# Altium PCB cover.PcbDoc
Units mil, origin at the board's own origin, x right, y up, seen from the top; angles counter-clockwise.
Board outline 7500 x 2300 mil, 2 copper layers (Top Layer, Bottom Layer); 34 components, 23 nets, 169 pads, 36 vias.
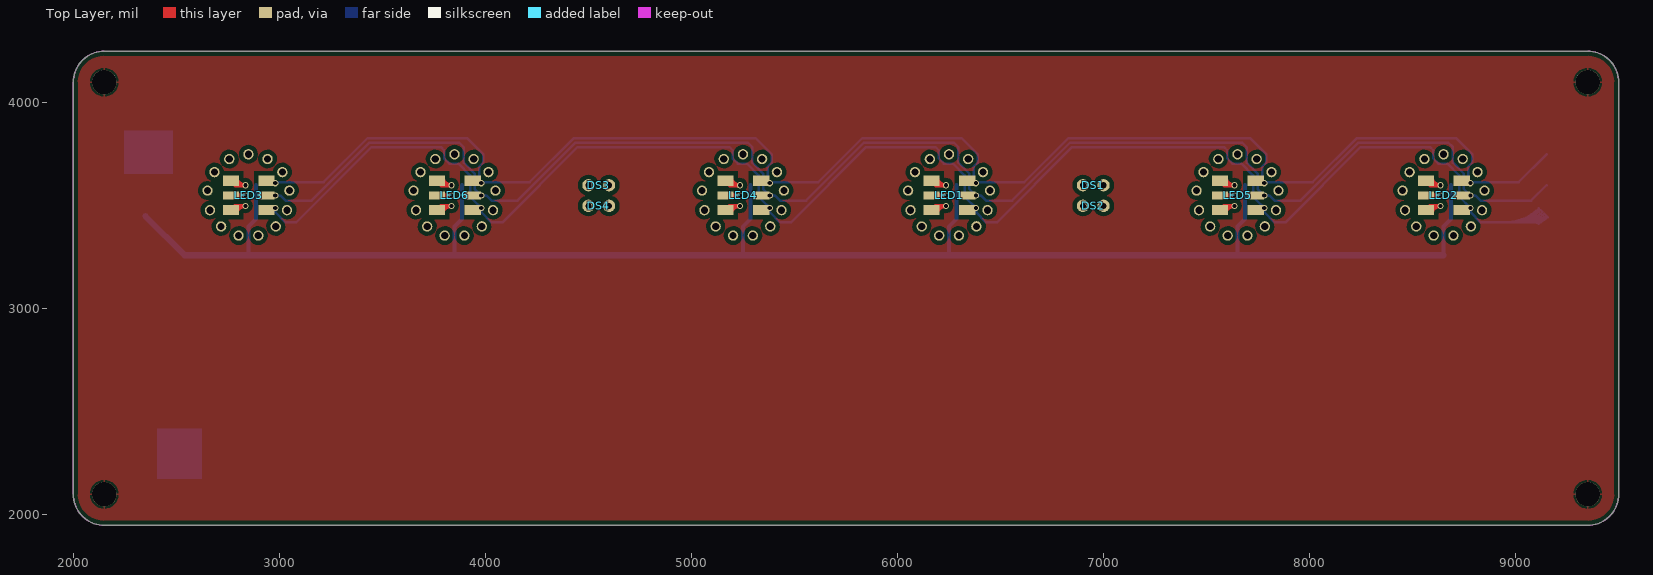
[diagram p0: Top Layer view]
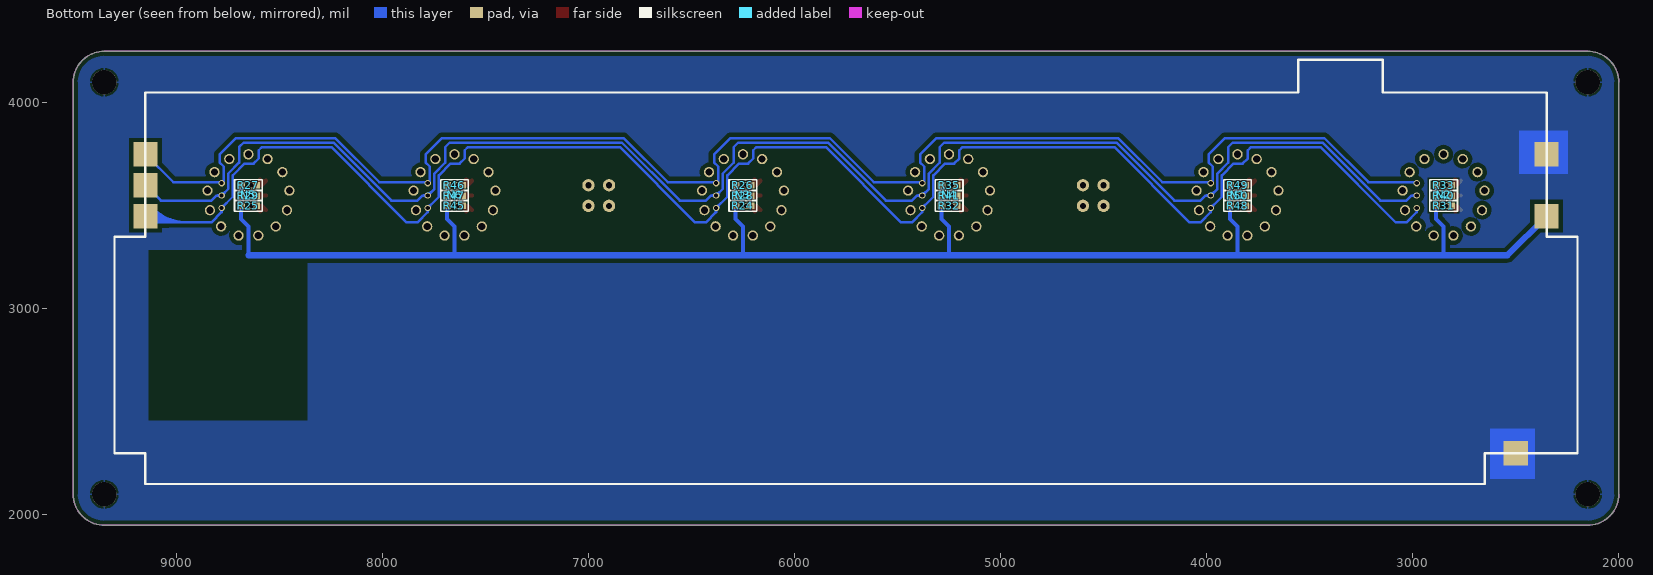
[diagram p1: Bottom Layer view, seen from below]
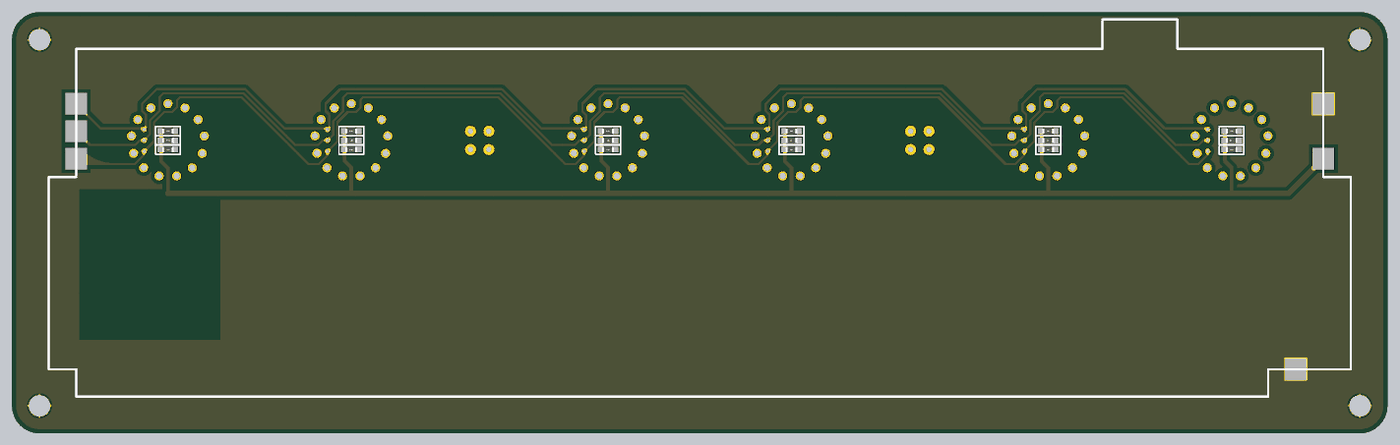
[diagram p2: 3D render of the assembled board from below, using the file's embedded part models]

## Layer stack, top to bottom
Top Solder: solder mask 0.4, Solder Resist, Dk 3.5
Top Layer: signal copper 1.4
Dielectric 1: dielectric 12.6, FR-4, Dk 4.8
Bottom Layer: signal copper 1.4
Bottom Solder: solder mask 0.4, Solder Resist, Dk 3.5

## Board outline
2000,2100 2000,4100 cw(c2150,4100) 2150,4250 9350,4250 cw(c9350,4100) 9500,4100 9500,2100 cw(c9350,2100) 9350,1950 2150,1950 cw(c2150,2100)

## Design rules (kind name [scope] priority, off if disabled: settings)
Clearance [All] p1: gap=20
PolygonConnect [All] p1: connectstyle=Relief reliefconductorwidth=10 reliefentries=4 polygonreliefangle="90 Angle" airgapwidth=10
RoutingVias [All] p1: holewidth=28 width=50 viastyle="Through Hole" minholewidth=28 minwidth=50 maxholewidth=28 maxwidth=50
SolderMaskExpansion [All] p1: expansion=4
Width [All] p1: maxlimit=100 minlimit=10 preferedwidth=10
29 further rules are at their usual default settings.

## Components (designator, comment, footprint, x,y, rotation, side; value= is the part's Value field where it differs from the comment)
DS1 "Lamp Neon" LED_PIN2 6900,3600 r0 top
DS2 "Lamp Neon" LED_PIN2 6900,3500 r0 top
DS3 "Lamp Neon" LED_PIN2 4600,3600 r180 top
DS4 "Lamp Neon" LED_PIN2 4600,3500 r180 top
LED1 "LED_RGB_5050" LED_RGB_5050 6165,3480 r90 top
LED2 "LED_RGB_5050" LED_RGB_5050 8565,3480 r90 top
LED3 "LED_RGB_5050" LED_RGB_5050 2765,3480 r90 top
LED4 "LED_RGB_5050" LED_RGB_5050 5165,3480 r90 top
LED5 "LED_RGB_5050" LED_RGB_5050 7565,3480 r90 top
LED6 "LED_RGB_5050" LED_RGB_5050 3765,3480 r90 top
N1 "ИН-14" IN14 3850,3550 r0 bottom
N2 "ИН-14" IN14 2850,3550 r0 bottom
N3 "ИН-14" IN14 6250,3550 r0 bottom
N4 "ИН-14" IN14 5250,3550 r0 bottom
N5 "ИН-14" IN14 8650,3550 r0 bottom
N6 "ИН-14" IN14 7650,3550 r0 bottom
R24 "Res2" "R 0603" 6250,3500 r0 bottom
R25 "Res2" "R 0603" 8650,3500 r0 bottom
R26 "Res2" "R 0603" 6250,3600 r0 bottom
R27 "Res2" "R 0603" 8650,3600 r0 bottom
R28 "Res2" "R 0603" 6250,3550 r0 bottom
R29 "Res2" "R 0603" 8650,3550 r0 bottom
R31 "Res2" "R 0603" 2850,3500 r0 bottom
R32 "Res2" "R 0603" 5250,3500 r0 bottom
R33 "Res2" "R 0603" 2850,3600 r0 bottom
R35 "Res2" "R 0603" 5250,3600 r0 bottom
R40 "Res2" "R 0603" 2850,3550 r0 bottom
R41 "Res2" "R 0603" 5250,3550 r0 bottom
R45 "Res2" "R 0603" 7650,3500 r0 bottom
R46 "Res2" "R 0603" 7650,3600 r0 bottom
R47 "Res2" "R 0603" 7650,3550 r0 bottom
R48 "Res2" "R 0603" 3850,3500 r0 bottom
R49 "Res2" "R 0603" 3850,3600 r0 bottom
R50 "Res2" "R 0603" 3850,3550 r0 bottom

## Footprints (in the part's own frame and the unit in brackets; to place one, negate y for a bottom-side part, rotate by r counter-clockwise, add the part's x,y. Pads: shape width x height; smd on the part's side, far side on the other; paste and mask are expansions set on the pad)
IN14 [mil]
  round 50 hole 35: 1(0,-200) 2(-93.03,-177.05) 3(-164.65,-113.54) 4(-198.55,-24.03) 5(-186.98,70.99) 6(-132.58,149.74) 7(-47.81,194.2) 8(47.91,194.18) 9(132.65,149.68) 10(187.01,70.89) 11(198.54,-24.13) 12(164.59,-113.63) 13(92.94,-177.09)
LED_PIN2 [mil] "Photosensitive Diode; 2 Leads"
  round 60 hole 30: 1(0,0) 2(100,0)
LED_RGB_5050 [mm]
  rect 1.27x2 smd: 0(0,0) 1(3.6,0) 3(0,-4.4) 4(3.6,-4.4)
  rect 1x2 smd: 2(1.778,0) 5(1.778,-4.4)
"R 0603" [mil] "1/10W贴片电阻"
  rect 40x31.5 smd: 1(-36.5,0) 2(36.5,0)
  silkscreen extent -68,-26 68,26, body extent -31,-16 31,16, height 16

## Part data
DS1 DS2 DS3 DS4: "Neon Lamp"
R24 R25 R26 R27 R28 R29 R31 R32 R33 R35 R40 R41 R45 R46 R47 R48 R49 R50: "Resistor"

## Free pads (board coordinates)
  round 118.11 hole 118.11: 0(2150,2100) 0(2150,4100) 0(9350,2100) 0(9350,4100)
  rect 118.11x118.11 smd far side: 0(9150,3750) 1(9150,3600) 2(9150,3450) 3(2350,3750) 4(2350,3450) 5(2500,2300)
  rect 118.11x118.11 on Bottom Solder: 5(2500,2300)

## Via types
v1: diameter 30, hole 20, Top Layer to Bottom Layer, 36 vias

## Nets (pads, with @x,y where several pads share a name; then routed paths per layer and width w, separated by ;. In a path a pad name is that pad's centre, name@x,y a point inside that pad or via, vN(x,y) a via of type N, cw(c..) or ccw(c..) an arc to the next point about the centre after c; other vN are vias at no path point)
5V: pad.4 R24.2 R25.2 R26.2 R27.2 R28.2 R29.2 R31.2 R32.2 R33.2 R35.2 R40.2 R41.2 R45.2 R46.2 R47.2 R48.2 R49.2 R50.2 | length 8509.4
  Bottom Layer w20: 2850,3260 2850,3400 2886.5,3436.5 R31.2 R40.2 R33.2 ; 3850,3260 3850,3400 3886.5,3436.5 R48.2 R50.2 R49.2 ; 5250,3260 5250,3400 5286.5,3436.5 R32.2 R41.2 R35.2 ; 6250,3260 6250,3400 6286.5,3436.5 R24.2 R28.2 R26.2 ; 7650,3260 7650,3400 7686.5,3436.5 R45.2 R47.2 R46.2 ; 8650,3260 8650,3400 8686.5,3436.5 R25.2 R29.2 R27.2
  Bottom Layer w30: pad.4 2540,3260 8650,3260
GND: pad.0@2150,2100 pad.0@2150,4100 pad.0@9350,2100 pad.0@9350,4100 pad.3 pad.5@2500,2300
LED_B: LED1.3 LED2.3 LED3.3 LED4.3 LED5.3 LED6.3 pad.2 | length 10835.3
  Bottom Layer w12: v1(2980,3490) 2980,3470 ; v1@3971,3490.07 ccw(c3949.85,3490.24) 3964.63,3505.37 ; v1@3971,3490.1 ccw(c3950.14,3490.35) 3965.06,3504.93 ccw(c3979.65,3519.86) v1@3979.9,3499 ; v1@3979.93,3499 cw(c3979.76,3520.15) 3964.63,3505.37 ; v1@5371,3490.07 ccw(c5349.85,3490.24) 5364.63,3505.37 ; v1@5371,3490.1 ccw(c5350.14,3490.35) 5365.06,3504.93 ccw(c5379.65,3519.86) v1@5379.9,3499 ; v1@5379.93,3499 cw(c5379.76,3520.15) 5364.63,3505.37 ; v1@6371,3490.07 ccw(c6349.85,3490.24) 6364.63,3505.37 ; v1@6371,3490.1 ccw(c6350.14,3490.35) 6365.06,3504.93 ccw(c6379.65,3519.86) v1@6379.9,3499 ; v1@6379.93,3499 cw(c6379.76,3520.15) 6364.63,3505.37 ; v1@7771,3490.07 ccw(c7749.85,3490.24) 7764.63,3505.37 ; v1@7771,3490.1 ccw(c7750.14,3490.35) 7765.06,3504.93 ccw(c7779.65,3519.86) v1@7779.9,3499 ; v1@7779.93,3499 cw(c7779.76,3520.15) 7764.63,3505.37 ; v1@8771,3490.07 ccw(c8749.85,3490.24) 8764.63,3505.37 ; v1@8771,3490.1 ccw(c8750.14,3490.35) 8765.06,3504.93 ccw(c8779.65,3519.86) v1@8779.9,3499 ; v1@8779.93,3499 cw(c8779.76,3520.15) 8764.63,3505.37 ; 9081.81,3429.65 ccw(c9066.43,3456.28) pad.2@9097.09,3453.98 ; 9083.99,3443.36 ccw(c9067.63,3470.72) pad.2@9098.55,3462.94 ; pad.2 9120,3420 8830,3420 8780,3470 ; 2980,3470 cw(c2997.72,3470) 2985.97,3483.26 ccw(c2997.72,3470) 2980,3470 ; 2980,3470 ccw(c2962.28,3470) 2974.03,3483.26 cw(c2962.28,3470) 2980,3470 ; 2980,3470 3030,3420 3082.23,3420 3447.23,3785 3785,3785 3800,3770 3800,3730 3825,3705 3868.89,3705 3926,3647.89 3926,3544 v1(3980,3490) 3980,3470 ; 3964.64,3505.36 cw(c3949.27,3490) 3971,3490 ccw(c3949.27,3490) 3964.64,3505.36 ; 3964.64,3505.36 ccw(c3980,3520.73) 3980,3499 cw(c3980,3520.73) 3964.64,3505.36 ; 3980,3470 cw(c3997.72,3470) 3985.97,3483.26 ccw(c3997.72,3470) 3980,3470 ; 3980,3470 ccw(c3962.28,3470) 3974.03,3483.26 cw(c3962.28,3470) 3980,3470 ; 3980,3470 4030,3420 4082.23,3420 4447.23,3785 5185,3785 5200,3770 5200,3730 5225,3705 5268.89,3705 5326,3647.89 5326,3544 v1(5380,3490) 5380,3470 ; 5364.64,3505.36 cw(c5349.27,3490) 5371,3490 ccw(c5349.27,3490) 5364.64,3505.36 ; 5364.64,3505.36 ccw(c5380,3520.73) 5380,3499 cw(c5380,3520.73) 5364.64,3505.36 ; 5380,3470 cw(c5397.72,3470) 5385.97,3483.26 ccw(c5397.72,3470) 5380,3470 ; 5380,3470 ccw(c5362.28,3470) 5374.03,3483.26 cw(c5362.28,3470) 5380,3470 ; 5380,3470 5430,3420 5482.23,3420 5847.23,3785 6185,3785 6200,3770 6200,3730 6225,3705 6268.89,3705 6326,3647.89 6326,3544 v1(6380,3490) 6380,3470 ; 6364.64,3505.36 cw(c6349.27,3490) 6371,3490 ccw(c6349.27,3490) 6364.64,3505.36 ; 6364.64,3505.36 ccw(c6380,3520.73) 6380,3499 cw(c6380,3520.73) 6364.64,3505.36 ; 6380,3470 cw(c6397.72,3470) 6385.97,3483.26 ccw(c6397.72,3470) 6380,3470 ; 6380,3470 ccw(c6362.28,3470) 6374.03,3483.26 cw(c6362.28,3470) 6380,3470 ; 6380,3470 6430,3420 6482.23,3420 6847.23,3785 7585,3785 7600,3770 7600,3730 7625,3705 7668.89,3705 7726,3647.89 7726,3544 v1(7780,3490) 7780,3470 ; 7764.64,3505.36 cw(c7749.27,3490) 7771,3490 ccw(c7749.27,3490) 7764.64,3505.36 ; 7764.64,3505.36 ccw(c7780,3520.73) 7780,3499 cw(c7780,3520.73) 7764.64,3505.36 ; 7780,3470 cw(c7797.72,3470) 7785.97,3483.26 ccw(c7797.72,3470) 7780,3470 ; 7780,3470 ccw(c7762.28,3470) 7774.03,3483.26 cw(c7762.28,3470) 7780,3470 ; 7780,3470 7830,3420 7882.23,3420 8247.23,3785 8585,3785 8600,3770 8600,3730 8625,3705 8668.89,3705 8726,3647.89 8726,3544 v1(8780,3490) 8780,3470 ; 8764.64,3505.36 cw(c8749.27,3490) 8771,3490 ccw(c8749.27,3490) 8764.64,3505.36 ; 8764.64,3505.36 ccw(c8780,3520.73) 8780,3499 cw(c8780,3520.73) 8764.64,3505.36 ; 8780,3470 cw(c8797.72,3470) 8785.97,3483.26 ccw(c8797.72,3470) 8780,3470 ; 8780,3470 ccw(c8762.28,3470) 8774.03,3483.26 cw(c8762.28,3470) 8780,3470 ; pad.2@9094.34,3420 cw(c9094.34,3394.34) 9112.48,3412.48 ccw(c9094.34,3394.34) pad.2@9094.34,3420 ; pad.2@9094.34,3420 ccw(c9094.34,3505.66) 9154.91,3445.09 cw(c9094.34,3505.66) pad.2@9094.34,3420 ; 8949.49,3420 ccw(c8949.49,3650.51) 9112.48,3487.52 cw(c8949.49,3650.51) 8949.49,3420 ; 8978.46,3420 ccw(c8978.46,3621.54) 9120.97,3479.03 cw(c8978.46,3621.54) 8978.46,3420 ; 9007.43,3420 ccw(c9007.43,3592.57) 9129.45,3470.55 cw(c9007.43,3592.57) 9007.43,3420 ; 9036.4,3420 ccw(c9036.4,3563.6) 9137.94,3462.06 cw(c9036.4,3563.6) 9036.4,3420 ; 9065.37,3420 ccw(c9065.37,3534.63) 9146.43,3453.57 cw(c9065.37,3534.63) 9065.37,3420
LED_G: LED1.4 LED2.4 LED3.4 LED4.4 LED5.4 LED6.4 pad.0@9150,3750 | length 7635.5
  Bottom Layer w12: v1@2985.13,3615.13 3215.13,3615.13 3429,3829 3911,3829 3990,3750 3990,3710 3970,3690 3970,3620 v1(3980,3610) 3985.13,3615.13 4215.13,3615.13 4429,3829 5311,3829 5390,3750 5390,3710 5370,3690 5370,3620 v1(5380,3610) ; v1@5385.13,3615.13 5615.13,3615.13 5829,3829 6311,3829 6390,3750 6390,3710 6370,3690 6370,3620 v1(6380,3610) 6385.13,3615.13 6615.13,3615.13 6829,3829 7711,3829 7790,3750 7790,3710 7770,3690 7770,3620 v1(7780,3610) ; v1@7785.13,3615.13 8015.13,3615.13 8229,3829 8711,3829 8790,3750 8790,3710 8770,3690 8770,3620 v1(8780,3610) 8785.13,3615.13 9015.13,3615.13 pad.0@9150,3750
  other v1: 2980,3610
LED_R: LED1.5 LED2.5 LED3.5 LED4.5 LED5.5 LED6.5 pad.1 | length 8903.8
  Bottom Layer w12: v1(2980,3550) 3005,3550 3030,3525 3156.11,3525 3438.11,3807 3873,3807 3895,3785 3895,3710 3948,3657 3948,3582 v1(3980,3550) 4005,3550 4030,3525 4156.11,3525 4438.11,3807 5273,3807 5295,3785 5295,3710 5348,3657 5348,3582 v1(5380,3550) 5405,3550 5430,3525 5556.11,3525 5838.11,3807 6273,3807 6295,3785 6295,3710 6348,3657 6348,3582 v1(6380,3550) 6405,3550 6430,3525 6556.11,3525 6838.11,3807 7673,3807 7695,3785 7695,3710 7748,3657 7748,3582 v1(7780,3550) 7805,3550 7830,3525 7956.11,3525 8238.11,3807 8673,3807 8695,3785 8695,3710 8748,3657 8748,3582 v1(8780,3550) 8805,3550 8830,3525 9075,3525 pad.1 ; v1@3971,3550.07 ccw(c3949.85,3550.24) 3964.63,3565.37 ; v1@3971,3550.1 ccw(c3950.14,3550.35) 3965.06,3564.93 ccw(c3979.65,3579.86) v1@3979.9,3559 ; v1@3979.93,3559 cw(c3979.76,3580.15) 3964.63,3565.37 ; v1@5371,3550.07 ccw(c5349.85,3550.24) 5364.63,3565.37 ; v1@5371,3550.1 ccw(c5350.14,3550.35) 5365.06,3564.93 ccw(c5379.65,3579.86) v1@5379.9,3559 ; v1@5379.93,3559 cw(c5379.76,3580.15) 5364.63,3565.37 ; v1@6371,3550.07 ccw(c6349.85,3550.24) 6364.63,3565.37 ; v1@6371,3550.1 ccw(c6350.14,3550.35) 6365.06,3564.93 ccw(c6379.65,3579.86) v1@6379.9,3559 ; v1@6379.93,3559 cw(c6379.76,3580.15) 6364.63,3565.37 ; v1@7771,3550.07 ccw(c7749.85,3550.24) 7764.63,3565.37 ; v1@7771,3550.1 ccw(c7750.14,3550.35) 7765.06,3564.93 ccw(c7779.65,3579.86) v1@7779.9,3559 ; v1@7779.93,3559 cw(c7779.76,3580.15) 7764.63,3565.37 ; v1@8771,3550.07 ccw(c8749.85,3550.24) 8764.63,3565.37 ; v1@8771,3550.1 ccw(c8750.14,3550.35) 8765.06,3564.93 ccw(c8779.65,3579.86) v1@8779.9,3559 ; v1@8779.93,3559 cw(c8779.76,3580.15) 8764.63,3565.37 ; 3001.73,3550 cw(c3001.73,3571.73) 2986.36,3556.36 ccw(c3001.73,3571.73) 3001.73,3550 ; 3001.73,3550 ccw(c3001.73,3528.27) 2986.36,3543.64 cw(c3001.73,3528.27) 3001.73,3550 ; 3964.64,3565.36 cw(c3949.27,3550) 3971,3550 ccw(c3949.27,3550) 3964.64,3565.36 ; 3964.64,3565.36 ccw(c3980,3580.73) 3980,3559 cw(c3980,3580.73) 3964.64,3565.36 ; 4001.73,3550 cw(c4001.73,3571.73) 3986.36,3556.36 ccw(c4001.73,3571.73) 4001.73,3550 ; 4001.73,3550 ccw(c4001.73,3528.27) 3986.36,3543.64 cw(c4001.73,3528.27) 4001.73,3550 ; 5364.64,3565.36 cw(c5349.27,3550) 5371,3550 ccw(c5349.27,3550) 5364.64,3565.36 ; 5364.64,3565.36 ccw(c5380,3580.73) 5380,3559 cw(c5380,3580.73) 5364.64,3565.36 ; 5401.73,3550 cw(c5401.73,3571.73) 5386.36,3556.36 ccw(c5401.73,3571.73) 5401.73,3550 ; 5401.73,3550 ccw(c5401.73,3528.27) 5386.36,3543.64 cw(c5401.73,3528.27) 5401.73,3550 ; 6364.64,3565.36 cw(c6349.27,3550) 6371,3550 ccw(c6349.27,3550) 6364.64,3565.36 ; 6364.64,3565.36 ccw(c6380,3580.73) 6380,3559 cw(c6380,3580.73) 6364.64,3565.36 ; 6401.73,3550 cw(c6401.73,3571.73) 6386.36,3556.36 ccw(c6401.73,3571.73) 6401.73,3550 ; 6401.73,3550 ccw(c6401.73,3528.27) 6386.36,3543.64 cw(c6401.73,3528.27) 6401.73,3550 ; 7764.64,3565.36 cw(c7749.27,3550) 7771,3550 ccw(c7749.27,3550) 7764.64,3565.36 ; 7764.64,3565.36 ccw(c7780,3580.73) 7780,3559 cw(c7780,3580.73) 7764.64,3565.36 ; 7801.73,3550 cw(c7801.73,3571.73) 7786.36,3556.36 ccw(c7801.73,3571.73) 7801.73,3550 ; 7801.73,3550 ccw(c7801.73,3528.27) 7786.36,3543.64 cw(c7801.73,3528.27) 7801.73,3550 ; 8764.64,3565.36 cw(c8749.27,3550) 8771,3550 ccw(c8749.27,3550) 8764.64,3565.36 ; 8764.64,3565.36 ccw(c8780,3580.73) 8780,3559 cw(c8780,3580.73) 8764.64,3565.36 ; 8801.73,3550 cw(c8801.73,3571.73) 8786.36,3556.36 ccw(c8801.73,3571.73) 8801.73,3550 ; 8801.73,3550 ccw(c8801.73,3528.27) 8786.36,3543.64 cw(c8801.73,3528.27) 8801.73,3550
NetLED1_0: LED1.0 R24.1 | length 277.5
  Top Layer w20: LED1.0 6185,3500 v1(6235,3500) ; LED1.0@6188.84,3491.64 ccw(c6198.49,3503.49) 6210.09,3493.54 ; v1(6235,3500) ccw(c6235,3453.29) 6192.89,3473.51 cw(c6235,3453.29) v1(6235,3500) ; LED1.0@6174.86,3482.16 cw(c6203.21,3468.55) 6203.21,3500 ccw(c6203.21,3468.55) LED1.0@6174.86,3482.16
NetLED1_1: LED1.1 R26.1 | length 285.5
  Top Layer w20: LED1.1 6186.73,3600 v1(6235,3600) ; LED1.1@6188.04,3609.49 cw(c6197.3,3596.43) 6209.89,3606.31 ; v1(6235,3600) cw(c6235,3645.49) 6193.16,3627.62 ccw(c6235,3645.49) v1(6235,3600) ; LED1.1@6174.77,3619.77 ccw(c6204.71,3632.55) 6204.71,3600 cw(c6204.71,3632.55) LED1.1@6174.77,3619.77
NetLED1_2: LED1.2 R28.1 | length 143.5
  Top Layer w20: LED1.2 v1(6235,3550) ; 6208.07,3550 cw(c6208.07,3573.38) 6191.53,3556.85 ccw(c6208.07,3573.38) 6208.07,3550 ; 6208.07,3550 ccw(c6208.07,3526.62) 6191.53,3543.15 cw(c6208.07,3526.62) 6208.07,3550
NetLED2_0: LED2.0 R25.1 | length 277.5
  Top Layer w20: LED2.0 8585,3500 v1(8635,3500) ; LED2.0@8588.84,3491.64 ccw(c8598.49,3503.49) 8610.09,3493.54 ; v1(8635,3500) ccw(c8635,3453.29) 8592.89,3473.51 cw(c8635,3453.29) v1(8635,3500) ; LED2.0@8574.86,3482.16 cw(c8603.21,3468.55) 8603.21,3500 ccw(c8603.21,3468.55) LED2.0@8574.86,3482.16
NetLED2_1: LED2.1 R27.1 | length 285.5
  Top Layer w20: LED2.1 8586.73,3600 v1(8635,3600) ; LED2.1@8588.04,3609.49 cw(c8597.3,3596.43) 8609.89,3606.31 ; v1(8635,3600) cw(c8635,3645.49) 8593.16,3627.62 ccw(c8635,3645.49) v1(8635,3600) ; LED2.1@8574.77,3619.77 ccw(c8604.71,3632.55) 8604.71,3600 cw(c8604.71,3632.55) LED2.1@8574.77,3619.77
NetLED2_2: LED2.2 R29.1 | length 143.5
  Top Layer w20: LED2.2 v1(8635,3550) ; 8608.07,3550 cw(c8608.07,3573.38) 8591.53,3556.85 ccw(c8608.07,3573.38) 8608.07,3550 ; 8608.07,3550 ccw(c8608.07,3526.62) 8591.53,3543.15 cw(c8608.07,3526.62) 8608.07,3550
NetLED3_0: LED3.0 R31.1 | length 277.5
  Top Layer w20: LED3.0 2785,3500 v1(2835,3500) ; LED3.0@2788.84,3491.64 ccw(c2798.49,3503.49) 2810.09,3493.54 ; v1(2835,3500) ccw(c2835,3453.29) 2792.89,3473.51 cw(c2835,3453.29) v1(2835,3500) ; LED3.0@2774.86,3482.16 cw(c2803.21,3468.55) 2803.21,3500 ccw(c2803.21,3468.55) LED3.0@2774.86,3482.16
NetLED3_1: LED3.1 R33.1 | length 285.5
  Top Layer w20: LED3.1 2786.73,3600 v1(2835,3600) ; LED3.1@2788.04,3609.49 cw(c2797.3,3596.43) 2809.89,3606.31 ; v1(2835,3600) cw(c2835,3645.49) 2793.16,3627.62 ccw(c2835,3645.49) v1(2835,3600) ; LED3.1@2774.77,3619.77 ccw(c2804.71,3632.55) 2804.71,3600 cw(c2804.71,3632.55) LED3.1@2774.77,3619.77
NetLED3_2: LED3.2 R40.1 | length 143.5
  Top Layer w20: LED3.2 v1(2835,3550) ; 2808.07,3550 cw(c2808.07,3573.38) 2791.53,3556.85 ccw(c2808.07,3573.38) 2808.07,3550 ; 2808.07,3550 ccw(c2808.07,3526.62) 2791.53,3543.15 cw(c2808.07,3526.62) 2808.07,3550
NetLED4_0: LED4.0 R32.1 | length 277.5
  Top Layer w20: LED4.0 5185,3500 v1(5235,3500) ; LED4.0@5188.84,3491.64 ccw(c5198.49,3503.49) 5210.09,3493.54 ; v1(5235,3500) ccw(c5235,3453.29) 5192.89,3473.51 cw(c5235,3453.29) v1(5235,3500) ; LED4.0@5174.86,3482.16 cw(c5203.21,3468.55) 5203.21,3500 ccw(c5203.21,3468.55) LED4.0@5174.86,3482.16
NetLED4_1: LED4.1 R35.1 | length 285.5
  Top Layer w20: LED4.1 5186.73,3600 v1(5235,3600) ; LED4.1@5188.04,3609.49 cw(c5197.3,3596.43) 5209.89,3606.31 ; v1(5235,3600) cw(c5235,3645.49) 5193.16,3627.62 ccw(c5235,3645.49) v1(5235,3600) ; LED4.1@5174.77,3619.77 ccw(c5204.71,3632.55) 5204.71,3600 cw(c5204.71,3632.55) LED4.1@5174.77,3619.77
NetLED4_2: LED4.2 R41.1 | length 143.5
  Top Layer w20: LED4.2 v1(5235,3550) ; 5208.07,3550 cw(c5208.07,3573.38) 5191.53,3556.85 ccw(c5208.07,3573.38) 5208.07,3550 ; 5208.07,3550 ccw(c5208.07,3526.62) 5191.53,3543.15 cw(c5208.07,3526.62) 5208.07,3550
NetLED5_0: LED5.0 R45.1 | length 277.5
  Top Layer w20: LED5.0 7585,3500 v1(7635,3500) ; LED5.0@7588.84,3491.64 ccw(c7598.49,3503.49) 7610.09,3493.54 ; v1(7635,3500) ccw(c7635,3453.29) 7592.89,3473.51 cw(c7635,3453.29) v1(7635,3500) ; LED5.0@7574.86,3482.16 cw(c7603.21,3468.55) 7603.21,3500 ccw(c7603.21,3468.55) LED5.0@7574.86,3482.16
NetLED5_1: LED5.1 R46.1 | length 285.5
  Top Layer w20: LED5.1 7586.73,3600 v1(7635,3600) ; LED5.1@7588.04,3609.49 cw(c7597.3,3596.43) 7609.89,3606.31 ; v1(7635,3600) cw(c7635,3645.49) 7593.16,3627.62 ccw(c7635,3645.49) v1(7635,3600) ; LED5.1@7574.77,3619.77 ccw(c7604.71,3632.55) 7604.71,3600 cw(c7604.71,3632.55) LED5.1@7574.77,3619.77
NetLED5_2: LED5.2 R47.1 | length 143.5
  Top Layer w20: LED5.2 v1(7635,3550) ; 7608.07,3550 cw(c7608.07,3573.38) 7591.53,3556.85 ccw(c7608.07,3573.38) 7608.07,3550 ; 7608.07,3550 ccw(c7608.07,3526.62) 7591.53,3543.15 cw(c7608.07,3526.62) 7608.07,3550
NetLED6_0: LED6.0 R48.1 | length 277.5
  Top Layer w20: LED6.0 3785,3500 v1(3835,3500) ; LED6.0@3788.84,3491.64 ccw(c3798.49,3503.49) 3810.09,3493.54 ; v1(3835,3500) ccw(c3835,3453.29) 3792.89,3473.51 cw(c3835,3453.29) v1(3835,3500) ; LED6.0@3774.86,3482.16 cw(c3803.21,3468.55) 3803.21,3500 ccw(c3803.21,3468.55) LED6.0@3774.86,3482.16
NetLED6_1: LED6.1 R49.1 | length 285.5
  Top Layer w20: LED6.1 3786.73,3600 v1(3835,3600) ; LED6.1@3788.04,3609.49 cw(c3797.3,3596.43) 3809.89,3606.31 ; v1(3835,3600) cw(c3835,3645.49) 3793.16,3627.62 ccw(c3835,3645.49) v1(3835,3600) ; LED6.1@3774.77,3619.77 ccw(c3804.71,3632.55) 3804.71,3600 cw(c3804.71,3632.55) LED6.1@3774.77,3619.77
NetLED6_2: LED6.2 R50.1 | length 143.5
  Top Layer w20: LED6.2 v1(3835,3550) ; 3808.07,3550 cw(c3808.07,3573.38) 3791.53,3556.85 ccw(c3808.07,3573.38) 3808.07,3550 ; 3808.07,3550 ccw(c3808.07,3526.62) 3791.53,3543.15 cw(c3808.07,3526.62) 3808.07,3550
pads on no net: DS1.1 DS1.2 DS2.1 DS2.2 DS3.1 DS3.2 DS4.1 DS4.2 N1.1 N1.2 N1.3 N1.4 N1.5 N1.6 N1.7 N1.8 N1.9 N1.10 N1.11 N1.12 N1.13 N2.1 N2.2 N2.3 N2.4 N2.5 N2.6 N2.7 N2.8 N2.9 N2.10 N2.11 N2.12 N2.13 N3.1 N3.2 N3.3 N3.4 N3.5 N3.6 N3.7 N3.8 N3.9 N3.10 N3.11 N3.12 N3.13 N4.1 N4.2 N4.3 N4.4 N4.5 N4.6 N4.7 N4.8 N4.9 N4.10 N4.11 N4.12 N4.13 N5.1 N5.2 N5.3 N5.4 N5.5 N5.6 N5.7 N5.8 N5.9 N5.10 N5.11 N5.12 N5.13 N6.1 N6.2 N6.3 N6.4 N6.5 N6.6 N6.7 N6.8 N6.9 N6.10 N6.11 N6.12 N6.13

## Polygon pours and split planes (outlines as drawn)
GND on Bottom Layer "Top Layer-No Net" (solid, remove dead copper, pour order 2): 1875,4365 1795,4285 1795,1740 9620,1740 9860,1980 9795,2045 9795,4370
GND on Top Layer "Top Layer-No Net" (solid, remove dead copper, pour order 4): 1805,4710 1805,1680 1910,1575 2150,1815 9895,1815 9895,4165 9580,4480

## Keep-outs
Keep-Out Layer:
  lines w5: 2000,2100 ccw(c2150,2100) 2150,1950 3550,1950 9350,1950 ccw(c9350,2100) 9500,2100 9500,4100 ccw(c9350,4100) 9350,4250 2150,4250 ccw(c2150,4100) 2000,4100 2000,2100

## Other copper
Bottom Layer:
  rectangle net GND: 2405,2175 2625,2420
  rectangle net GND: 2245,3655 2485,3865
  pour cut-out: 9135,3285 9135,2460 8365,2460 8365,3285

## Silkscreen, mask and mechanical layers (free items; w line width, h text height)
Bottom Overlay:
  lines w11.81: 9150,3500 9150,3900 ; 9150,3900 9150,3350 9300,3350 9300,2300 9150,2300 9150,2150 2650,2150 2650,2300 2200,2300 2200,3350 2350,3350 2350,4050 3145,4050 3145,4210 3555,4210 3555,4050 9150,4050 9150,3900
Top Solder:
  drawing of 18155 lines, arcs and shapes, not listed
  text "There is no end though there is a start in space.——Infinity." at 4565.48,3000 h120
  text "It has own power, it ruins, and it goes though there is a start also in the star. ——Finite." at 4018.44,2875 h120
  text "Only the person who was wisdom can read the most foolish one from the history." at 4184.43,2750 h120
  text "The fish that lives in the sea doesn't know the world in the land." at 4511.08,2625 h120
  text "It also ruins and goes if they have wisdom." at 4901.02,2500 h120
  text "It is funnier that man exceeds the speed of light than fish start living in the land." at 4167.22,2375 h120
  text "It can be said that this is an final ultimatum from the god to the people who can fight." at 4062.35,2250 h120